# Altium PCB TPS40304_DEMO.PcbDoc
Units mil, origin at the board's own origin, x right, y up, seen from the top; angles counter-clockwise.
Board outline 6000 x 4000 mil, 2 copper layers (Top Layer, Bottom Layer); 38 components, 17 nets, 117 pads, 179 vias.
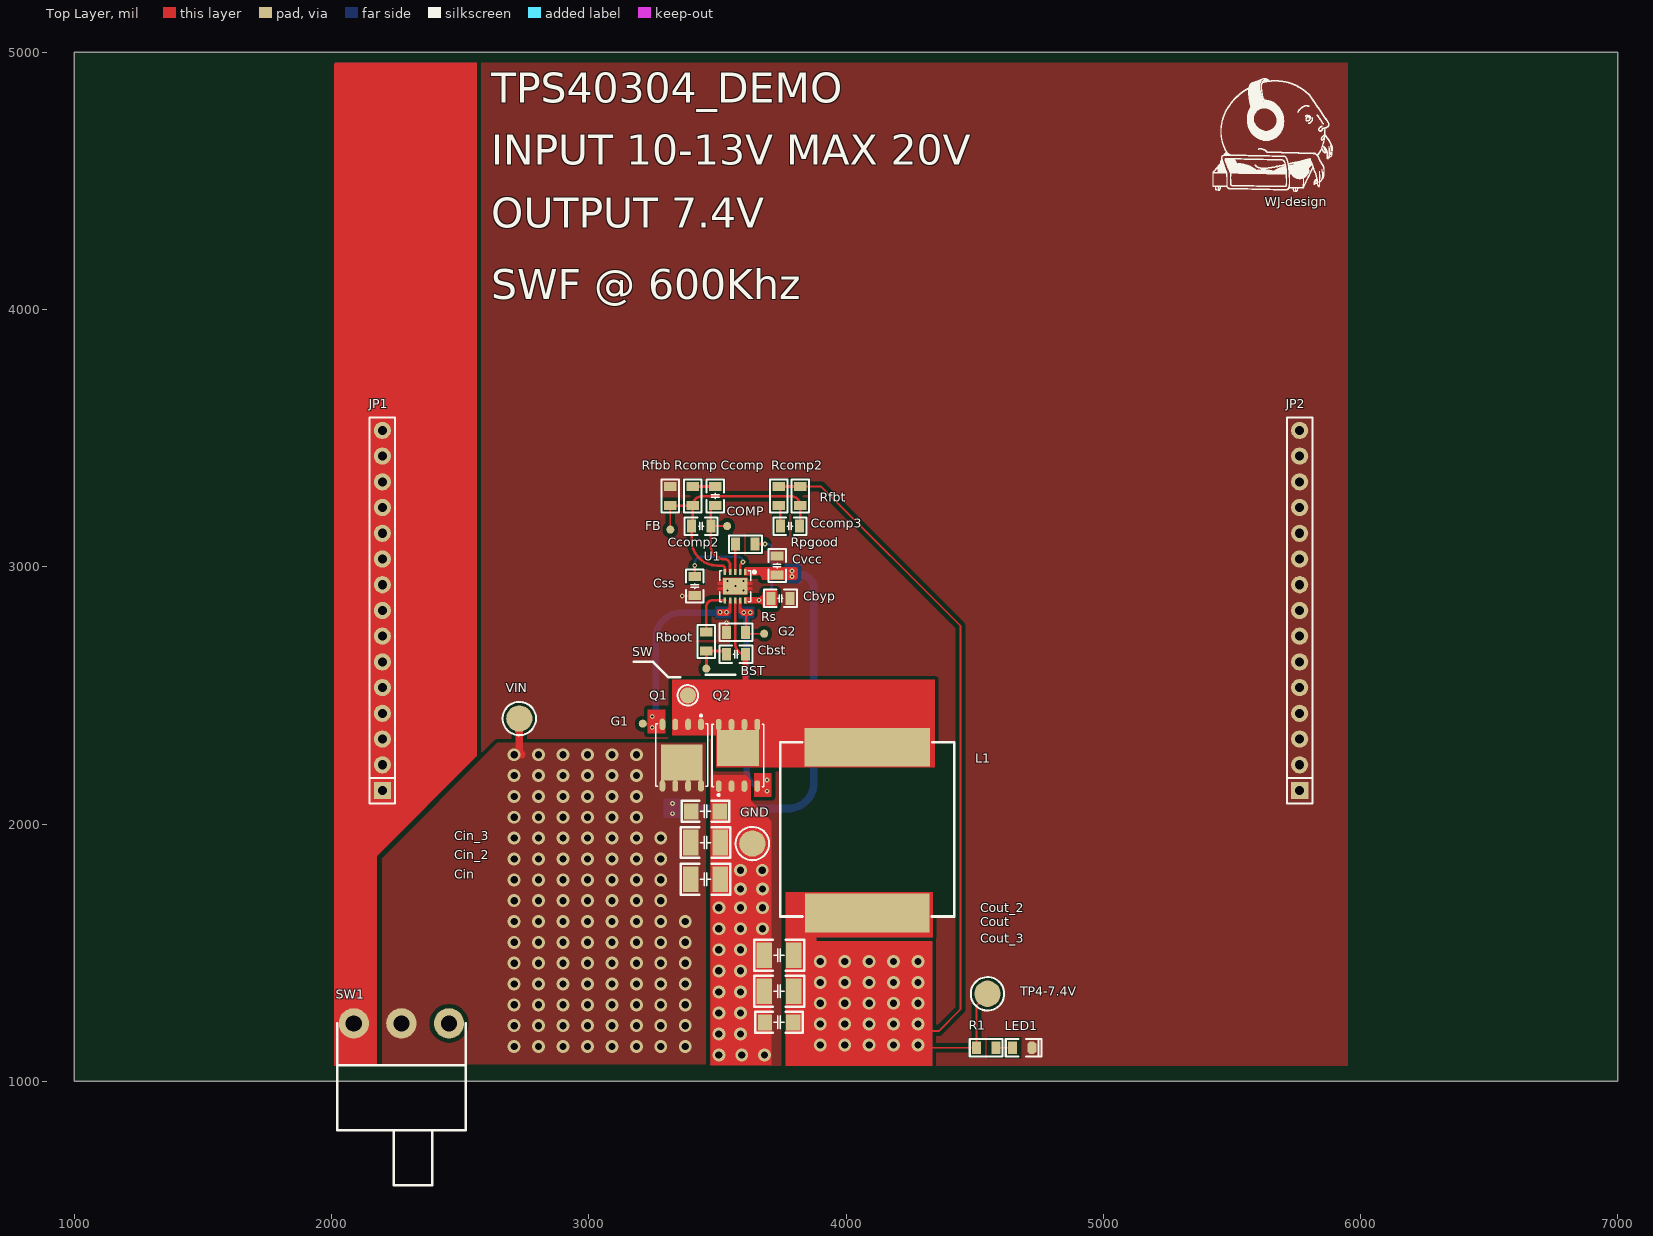
[diagram p0: Top Layer view]
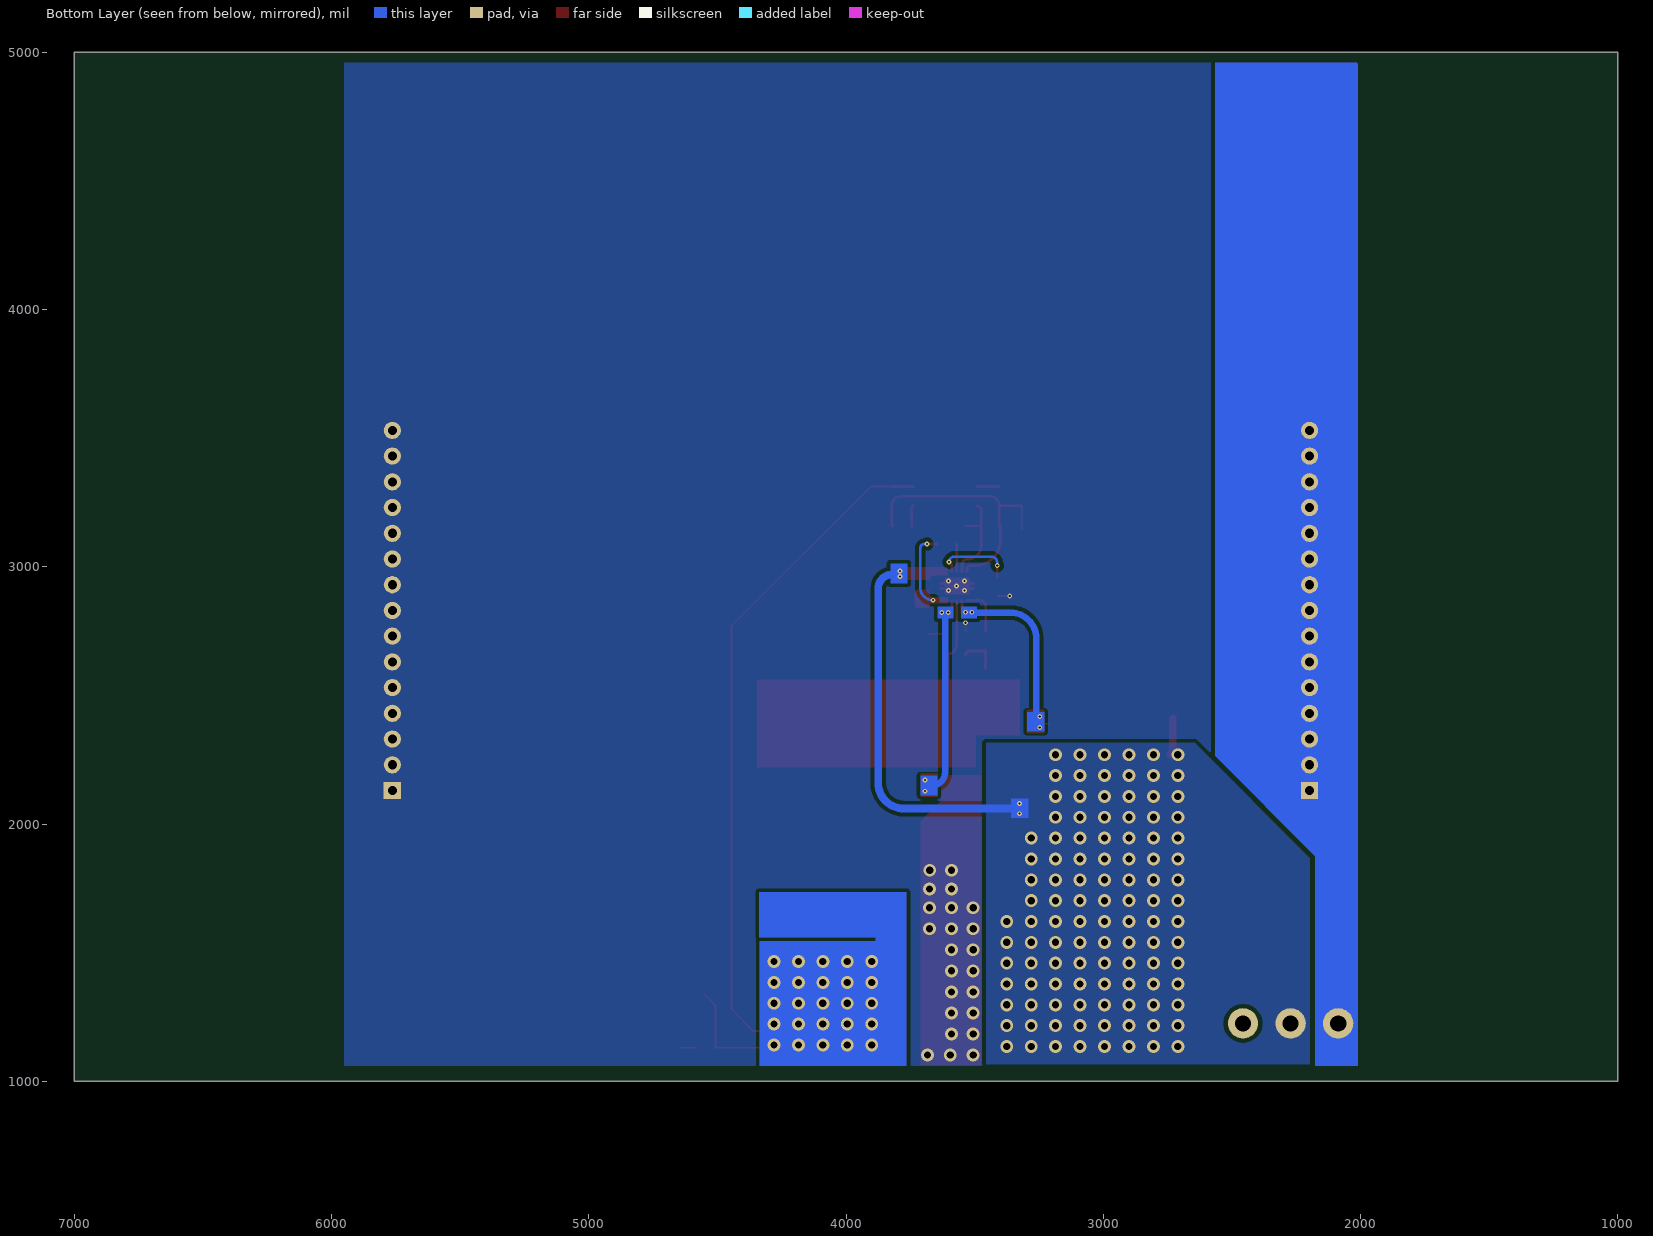
[diagram p1: Bottom Layer view, seen from below]

## Layer stack, top to bottom
Top Solder: solder mask 0.4, Solder Resist, Dk 3.5
Top Layer: signal copper 1.4
Dielectric 1: dielectric 12.6, FR-4, Dk 4.8
Bottom Layer: signal copper 1.4
Bottom Solder: solder mask 0.4, Solder Resist, Dk 3.5

## Board outline
1000,1000 7000,1000 7000,5000 1000,5000

## Design rules (kind name [scope] priority, off if disabled: settings)
Clearance inpg [InPolygon] p1: gap=16 ignorepadtopadclearanceinfootprint=FALSE
Clearance [All] p2: gap=7 ignorepadtopadclearanceinfootprint=FALSE
ComponentClearance [All] p1: gap=1 collisioncheckmode=3 verticalgap=1 showdistances=FALSE
PolygonConnect [All] p1: connectstyle=Direct reliefconductorwidth=10 reliefentries=4 polygonreliefangle="90 Angle" airgapwidth=10
RoutingVias [All] p1: holewidth=28 width=50 viastyle="Through Hole" minholewidth=28 minwidth=50 maxholewidth=28 maxwidth=50
SolderMaskExpansion [All] p1: expansion=4 istentingtop=FALSE
Width [All] p1: maxlimit=100 minlimit=7 preferedwidth=20
29 further rules are at their usual default settings.

## Classes and differential pairs
component class TPS40304_DEMO: BST Cbst Cbyp Ccomp Ccomp2 Ccomp3 Cin Cin_2 Cin_3 Cout Cout_2 Cout_3 Css Cvcc FB G1 G2 GND JP1 JP2 L1 LED1 Q1 Q2 R1 Rboot Rcomp Rcomp2 Rfbb Rfbt Rpgood Rs SW SW1 TP4-7.4V VIN

## Components (designator, comment, footprint, x,y, rotation, side; value= is the part's Value field where it differs from the comment)
BST "TEST" "TEST 0.8" 3456.96,2604.26 r0 top (schematic designator TP5)
Cbst "GRM155R71C104KA88D" "C 0805_L" 3571.96,2659.75 r0 top value=100nF
Cbyp "LMK212BJ475KD-T" "C 0805_L" 3744.95,2876.94 r0 top value=4.7uF
Ccomp "CGA4F2C0G1H153J085AA" "C 0805_L" 3491.96,3274.75 r270 top value=15nF
Ccomp2 "CL21C331JBANNNC" "C 0805_L" 3436.96,3158.14 r0 top value=330pF
Ccomp3 "C2012C0G1H182K060AA" "C 0805_L" 3782.47,3158.14 r0 top value=1.8nF
Cin "C3225X7R1H106M250AC" "C 1210_L" 3453.81,1785 r0 top value=10uF
Cin_2 "C3225X7R1H106M250AC" "C 1210_L" 3453.81,1927.99 r0 top value=10uF
Cin_3 "C3225X7R1H106M250AC" "C 1206_L" 3453.81,2049 r0 top value=10uF
COMP "TEST" "TEST 0.8" 3538.09,3158.14 r0 top (schematic designator TP6)
Cout "CL32B106KBJNNWE" "C 1210_L" 3740,1350 r180 top value=10uF
Cout_2 "CL32B106KBJNNWE" "C 1210_L" 3740,1490 r180 top value=10uF
Cout_3 "CL32B106KBJNNWE" "C 1206_L" 3740,1228.99 r180 top value=10uF
Css "GRM033R71A332KA01D" "C 0805_L" 3411.96,2924.75 r270 top value=3.3nF
Cvcc "TMK212B7105KG-T" "C 0805_L" 3731.9,3004.53 r90 top value=1uF
FB "TEST" "TEST 0.8" 3316.96,3144.75 r0 top (schematic designator TP9)
G1 "TEST" "TEST 0.8" 3210,2390 r0 top (schematic designator TP2)
G2 "TEST" "TEST 0.8" 3681.96,2739.75 r0 top (schematic designator TP7)
GND "TEST" "TEST 2.6" 3636.05,1923.99 r0 top (schematic designator TP8)
JP1 "HDR-1X15" HDR2.54-LI-15P 2197.63,2830.14 r90 top
JP2 "HDR-1X15" HDR2.54-LI-15P 5763.63,2830.14 r90 top
L1 "3.3UH" SMD-L-1770 4070,2010 r0 top
LED1 "红色" "LED 0805G" 4685,1130 r0 top
Q1 "IRFH7440TRPBF" PQFN-8P_L5.8-W4.9-P1.27-LS6.0-BL 3361.5,2239.03 r180 top
Q2 "IRFH7440TRPBF" PQFN-8P_L5.8-W4.9-P1.27-LS6.0-BL 3579.69,2295.31 r0 top
R1 "10K" "R 0805_L" 4545,1130 r0 top
Rboot "CRCW04022K87FKED" "R 0805_L" 3456.96,2709.75 r270 top value=10R
Rcomp "CRCW04021K24FKED" "R 0805_L" 3404.46,3274.75 r270 top value=1.24k
Rcomp2 "CRCW0402243RFKED" "R 0805_L" 3738.64,3274.75 r270 top value=243
Rfbb "CRCW0402887RFKED" "R 0805_L" 3316.96,3274.75 r90 top value=887
Rfbt "RC0201FR-0710KL" "R 0805_L" 3821.96,3274.75 r270 top value=10k
Rpgood "CRCW0402100KFKED" "R 0805_L" 3608.61,3088.24 r180 top value=100k
Rs "CRCW04022K87FKED" "R 0805_L" 3571.96,2744.75 r180 top value=2.87k
SW "TEST" "TEST 1.6" 3385,2500 r0 top (schematic designator TP3)
SW1 "SS12D06(弯角拨动开关) COPY" SS12_d06 2275,1035 r90 top
TP4-7.4V "TEST" "TEST 2.6" 4550,1340 r0 top (schematic designator TP4)
U1 "TPS40304DRCR" WSON-10_L3.0-W3.0-P0.50-TL-EP 3571.96,2924.75 r270 top value=N/A
VIN "TEST" "TEST 2.6" 2730,2410 r0 top (schematic designator TP1)

## Footprints (in the part's own frame and the unit in brackets; to place one, negate y for a bottom-side part, rotate by r counter-clockwise, add the part's x,y. Pads: shape width x height; smd on the part's side, far side on the other; paste and mask are expansions set on the pad)
"C 0805_L" [mil] "无极性贴片电容"
  rect 35x50 smd: 1(-37.4,0) 2(37.4,0)
  silkscreen extent -64,-34 64,34, body extent -39,-24 39,24, height 20
"C 1206_L" [mil] "无极性贴片电容"
  rect 55x62 smd: 1(-55.12,0) 2(55.11,0)
  silkscreen extent -92,-41 92,41, body extent -63,-32 63,32, height 48
"C 1210_L" [mil] "无极性贴片电容"
  rect 60x100 smd: 1(-57.09,0) 2(57.09,0)
  silkscreen extent -97,-60 97,60, body extent -63,-51 63,51, height 60
HDR2.54-LI-15P [mm] "排针，15脚"
  rect 1.7x1.7 hole 0.9: 1(-17.78,0)
  round 1.7 hole 0.9: 2(-15.24,0) 3(-12.7,0) 4(-10.16,0) 5(-7.62,0) 6(-5.08,0) 7(-2.54,0) 8(0,0) 9(2.54,0) 10(5.08,0) 11(7.62,0) 12(10.16,0) 13(12.7,0) 14(15.24,0) 15(17.78,0)
  silkscreen extent -19.05,-1.27 19.05,1.27, body extent -19.05,-1.27 19.05,1.27, height 8.5
"LED 0805G" [mil] "绿色0805LED"
  rect 35x50 smd: 1(-37.4,0)
  oct 35x50 smd: 2(37.4,0)
  silkscreen extent -64,-33 75,33, body extent -39,-25 39,25, height 32
PQFN-8P_L5.8-W4.9-P1.27-LS6.0-BL [mm]
  oval 0.567x1.141 smd: 1(-1.897,-3.761) 2(-0.627,-3.761) 3(0.643,-3.761) 4(1.913,-3.761) 5(1.913,2.315) 6(0.643,2.315) 7(-0.627,2.315) 8(-1.897,2.315)
  rect 4.11x3.55 smd: 9(0.008,-0.008)
  silkscreen extent -2.56,-4.73 2.57,2.37
"R 0805_L" [mil] "1/8W贴片电阻"
  rect 35x50 smd: 1(-37.4,0) 2(37.4,0)
  silkscreen extent -64,-34 64,34, body extent -39,-25 39,25, height 20
SMD-L-1770 [mm]
  rect 12.35x3.825 smd: 1(0.318,7.315)
  rect 12.32x3.825 smd: 2(0.317,-9.04)
  silkscreen extent -8.28,-9.38 8.92,7.82
SS12_d06 [mm]
  round 3 hole 1.6: 1(4.823,-4.614) 2(4.823,0.085) 3(4.823,4.784)
  silkscreen extent -11.18,-6.27 4.82,6.43
"TEST 0.8" [mm] "测试点0.8mm"
  round 0.8 smd: 1(0,0)
"TEST 1.6" [mm] "测试点1.6mm"
  round 1.6 smd paste-1.6: 1(0,0)
  silkscreen extent -1.01,-1.02 1.02,1.02
"TEST 2.6" [mm] "测试点2.6mm"
  round 2.6 smd paste-2.6: 1(0,0)
  silkscreen extent -1.65,-1.65 1.65,1.65
WSON-10_L3.0-W3.0-P0.50-TL-EP [mm]
  rect 0.6x0.25 smd: 1(-1.4,0.923) 2(-1.4,0.422) 3(-1.4,-0.078) 4(-1.4,-0.578) 5(-1.4,-1.079) 6(1.4,-1.079) 7(1.4,-0.578) 8(1.4,-0.078) 9(1.4,0.422) 10(1.4,0.923)
  rect 1.65x2.4 smd: 11(0.005,-0.077)
  Top Layer region: -0.125,1.622 -0.125,1.122 0.125,1.122 0.125,1.622 0.375,1.622 0.375,1.122 0.825,1.122 0.825,-1.278 0.375,-1.278 0.375,-1.778 0.125,-1.778 0.125,-1.278 -0.125,-1.278 -0.125,-1.778 -0.125,-1.778 -0.375,-1.778 -0.375,-1.278 -0.825,-1.278 -0.825,1.122 -0.375,1.122 -0.375,1.622
  silkscreen extent -1.52,-1.6 1.52,1.95

## Part data
BST COMP FB G1 G2 GND SW TP4-7.4V VIN: "测试点", BOM名称=测试点, 学习资源=www.ooocke.com, 版权归属=源创客
Cbst: "GRM155R71C104KA8", Manufacturer Name=MuRata, Manufacturer Part Number=GRM155R71C104KA88D, PackageReference=GRM155R71C104KA88D
Cbyp Cvcc: Manufacturer Name="Taiyo Yuden"
  Cbyp: Manufacturer Part Number=LMK212BJ475KD-T, PackageReference=LMK212BJ475KD-T
  Cvcc: Manufacturer Part Number=TMK212B7105KG-T, PackageReference=TMK212B7105KG-T
Ccomp: "CGA4F2C0G1H153J0", Manufacturer Name=TDK, Manufacturer Part Number=CGA4F2C0G1H153J085AA, PackageReference=CGA4F2C0G1H153J085AA
Ccomp2 Cout Cout_2 Cout_3: Manufacturer Name="Samsung Electro-Mechanics"
  Ccomp2: Manufacturer Part Number=CL21C331JBANNNC, PackageReference=CL21C331JBANNNC
  Cout Cout_2 Cout_3: Manufacturer Part Number=CL32B106KBJNNWE, PackageReference=CL32B106KBJNNWE
Ccomp3: "C2012C0G1H182K06", Manufacturer Name=TDK, Manufacturer Part Number=C2012C0G1H182K060AA, PackageReference=C2012C0G1H182K060AA
Cin Cin_2 Cin_3: "C3225X7R1H106M25", Manufacturer Name=TDK, Manufacturer Part Number=C3225X7R1H106M250AC, PackageReference=C3225X7R1H106M250AC
Css: "GRM033R71A332KA0", Manufacturer Name=MuRata, Manufacturer Part Number=GRM033R71A332KA01D, PackageReference=GRM033R71A332KA01D
JP1 JP2: library part "Header 15", "15P接插件", BOM名称=15P接插件, 学习资源=www.ooocke.com, 版权归属=源创客
L1: library part L-CD, "贴片功率电感", BOM名称=功率电感, 学习资源=www.ooocke.com, 版权归属=源创客
LED1: library part LED-SMD, "贴片LED", BOM名称=贴片LED, 学习资源=www.ooocke.com, 版权归属=源创客
R1: library part R, "贴片电阻", BOM名称=贴片电阻, 学习资源=www.ooocke.com, 版权归属=源创客
Rboot Rcomp Rcomp2 Rfbb Rpgood Rs: Manufacturer Name=Vishay-Dale
  Rboot Rs: Manufacturer Part Number=CRCW04022K87FKED, PackageReference=CRCW04022K87FKED
  Rcomp: Manufacturer Part Number=CRCW04021K24FKED, PackageReference=CRCW04021K24FKED
  Rcomp2: Manufacturer Part Number=CRCW0402243RFKED, PackageReference=CRCW0402243RFKED
  Rfbb: Manufacturer Part Number=CRCW0402887RFKED, PackageReference=CRCW0402887RFKED
  Rpgood: Manufacturer Part Number=CRCW0402100KFKED, PackageReference=CRCW0402100KFKED
Rfbt: Manufacturer Name=Yageo, Manufacturer Part Number=RC0201FR-0710KL, PackageReference=RC0201FR-0710KL
U1: Manufacturer Name="Texas Instruments", Manufacturer Part Number=TPS40304DRCR, PackageReference=TPS40304DRCR

## Via types
v1: diameter 50, hole 28, Top Layer to Bottom Layer, 156 vias
v2: diameter 19, hole 8, Top Layer to Bottom Layer, 23 vias

## Nets (pads, with @x,y where several pads share a name; then routed paths per layer and width w, separated by ;. In a path a pad name is that pad's centre, name@x,y a point inside that pad or via, vN(x,y) a via of type N, cw(c..) or ccw(c..) an arc to the next point about the centre after c; other vN are vias at no path point)
0: Cbyp.2 Cin.2 Cin_2.2 Cin_3.2 Cout.2 Cout_2.2 Cout_3.2 Css.2 Cvcc.2 GND.1 JP2.1 JP2.2 JP2.3 JP2.4 JP2.5 JP2.6 JP2.7 JP2.8 JP2.9 JP2.10 JP2.11 JP2.12 JP2.13 JP2.14 JP2.15 LED1.2 Q2.1 Q2.2 Q2.3 Rfbb.2 Rs.2 U1.11 | length 86.6
  Top Layer w7: v2(3363.36,2886.68) 3411.28,2886.68 Css.2 ; Rs.2 3534.73,2744.93 v2(3534.73,2782.43)
  other v1: 3505.62,1102.14 3594.56,1102.14 3683.51,1102.14 3505.62,1183.91 3590.31,1183.91 3505.62,1265.67 3590.31,1265.67 3505.62,1347.44 3590.31,1347.44 3505.62,1429.21 3590.31,1429.21 3505.62,1510.98 3590.31,1510.98 3505.62,1592.75 3590.31,1592.75 3675,1592.75 3505.62,1674.51 3590.31,1674.51 3675,1674.51 3590.31,1747.26 3675.13,1747.26 3590.31,1820 3674.22,1820
  other v2: 3539.63,2907.57 3601.89,2907.57 3570.68,2925.96 3539.63,2944.33 3601.89,2944.33
NetCbst_1: BST.1 Cbst.1 Rboot.2 | length 152.9
  Top Layer w12: BST.1 Rboot.2 3521.95,2672.36 cw(c3521.95,2659.75) Cbst.1
NetCbst_2: Cbst.2 L1.1 Q1.1 Q1.2 Q1.3 Q2.5 Q2.6 Q2.7 Q2.8 Q2.9 SW.1 U1.8 | length 360.2
  Top Layer w10: U1.8 3568.89,2700.22 ccw(c3609.36,2700.22) Cbst.2
  Top Layer w25: 3605,2535 ccw(c3605,2539.36) 3609.36,2539.36 Cbst.2
NetCbyp_1: Cbyp.1 Rpgood.1 U1.10 | length 297.7
  Top Layer w10: Rpgood.1 3646.27,3088.5 v2(3684.83,3088.5)
  Bottom Layer w10: v2(3661.59,2870.03) ccw(c3661.59,2920.4) 3711.96,2920.4 3711.96,3070.11 ccw(c3692.87,3070.11) v2@3692.87,3089.19
NetCcomp2_1: Ccomp2.1 Ccomp3.2 FB.1 Rcomp.2 Rfbb.1 Rfbt.2 U1.5 | length 1062.6
  Top Layer w7: FB.1 Rfbb.1
  Top Layer w10: Rfbb.1@3316.96,3237.36 Rcomp.2 ; U1.5 3529.49,2992.22 ccw(c3516.96,2992.22) 3516.96,3004.75 3499.55,3004.75 cw(c3499.55,3104.75) 3399.55,3104.75 Ccomp2.1 ccw(c3399.55,3163.04) 3404.46,3163.04 Rcomp.2 ; Ccomp3.2 ccw(c3819.87,3160.22) 3821.96,3160.22 Rfbt.2 ccw(c3784.56,3237.36) 3784.56,3274.75 3441.85,3274.75 ccw(c3441.85,3237.36) Rcomp.2
NetCcomp2_2: Ccomp2.2 Ccomp.2 COMP.1 U1.4 | length 374
  Top Layer w7: Ccomp2.2 COMP.1
  Top Layer w10: Ccomp.2 ccw(c3491.96,3219.76) 3474.36,3219.76 Ccomp2.2 3474.36,3082.36 ccw(c3526.96,3082.36) 3526.96,3029.75 cw(c3526.96,3007.52) 3549.19,3007.52 U1.4
NetCcomp3_1: Ccomp3.1 Rcomp2.2 | length 82.9
  Top Layer w10: Rcomp2.2 cw(c3738.64,3230.93) 3745.06,3230.93 Ccomp3.1
NetCcomp_1: Ccomp.1 Rcomp.1 | length 87.5
  Top Layer w10: Rcomp.1 Ccomp.1
NetCout_1: Cout.1 Cout_2.1 Cout_3.1 L1.2 R1.1 Rcomp2.1 Rfbt.1 TP4-7.4V.1 | length 3273
  Top Layer w7: Rfbt.1@3822.25,3311.87 3903.13,3311.87 4445,2770 4445,1280 4360,1195 4085,1195 ; v1@4280,1135 4285,1130 R1.1 4507.6,1295.17 4550,1337.58 TP4-7.4V.1
  Top Layer w10: Rcomp2.1 Rfbt.1
  other v1: 3900,1141 3995,1141 4090,1141 4185,1141 4280,1141 3900,1222 3995,1222 4090,1222 4185,1222 4280,1222 3900,1303 3995,1303 4090,1303 4185,1303 4280,1303 3900,1384 3995,1384 4090,1384 4185,1384 4280,1384 3900,1465 3995,1465 4090,1465 4185,1465 4280,1465
NetCss_1: Css.1 U1.2 | length 308.8
  Top Layer w10: Css.1 v2(3411.96,3004.75) ; U1.2 3588.59,3006.68 3598.97,3017.07 v2(3598.97,3018.29)
  Bottom Layer w10: v2(3411.96,3004.75) 3411.96,3014.75 cw(c3436.96,3014.75) 3436.96,3039.75 3577.51,3039.75 cw(c3577.51,3018.29) v2(3598.97,3018.29)
NetJP1_1: JP1.1 JP1.2 JP1.3 JP1.4 JP1.5 JP1.6 JP1.7 JP1.8 JP1.9 JP1.10 JP1.11 JP1.12 JP1.13 JP1.14 JP1.15 SW1.3
NetLED1_1: LED1.1 R1.2 | length 65.2
  Top Layer w7: R1.2 LED1.1
NetQ1_4: G1.1 Q1.4 U1.7 | length 669.9
  Top Layer w7: G1.1 3283.27,2390 Q1.4
  Bottom Layer w25: 3260,2425 3260,2721.3 cw(c3360,2721.3) 3360,2821.3 3499.14,2821.3
  other v2: 3246.73,2374.53 3246.73,2418.39 3510.95,2823.08 3536.17,2823.08
NetQ2_4: G2.1 Q2.4 Rs.1 U1.9 | length 834.1
  Top Layer w7: Rs.1@3611.96,2747.35 3619.56,2739.75 G2.1
  Top Layer w10: Rs.1@3611.96,2747.35 3611.96,2819.75
  Bottom Layer w25: 3615,2810 3615,2200 ccw(c3665,2200) 3665,2150
  other v2: 3693.12,2127.48 3693.12,2171.34 3602.61,2822.92 3627.84,2822.92
NetRboot_1: Rboot.1 U1.6 | length 184.3
  Top Layer w10: Rboot.1 3456.96,2844.75 cw(c3481.84,2844.75) 3481.84,2869.63 U1.6
NetRpgood_2: Rpgood.2 U1.3 | length 109.7
  Top Layer w10: U1.3 3568.89,3085.93 cw(c3571.21,3085.93) Rpgood.2
VCC: Cin.1 Cin_2.1 Cin_3.1 Cvcc.1 Q1.5 Q1.6 Q1.7 Q1.8 Q1.9 SW1.2 U1.1 VIN.1 | length 1587.6
  Top Layer w30: VIN.1 2730,2280 2740,2270
  Bottom Layer w30: 3345,2060 3775,2060 ccw(c3775,2160) 3875,2160 3875,2915 ccw(c3820,2915) 3820,2970 3805,2970
  other v1: 2710,1135 2805,1135 2900,1135 2995,1135 3090,1135 3185,1135 3280,1135 3375,1135 2710,1216 2805,1216 2900,1216 2995,1216 3090,1216 3185,1216 3280,1216 3375,1216 2710,1297 2805,1297 2900,1297 2995,1297 3090,1297 3185,1297 3280,1297 3375,1297 2710,1378 2805,1378 2900,1378 2995,1378 3090,1378 3185,1378 3280,1378 3375,1378 2710,1459 2805,1459 2900,1459 2995,1459 3090,1459 3185,1459 3280,1459 3375,1459 2710,1540 2805,1540 2900,1540 2995,1540 3090,1540 3185,1540 3280,1540 3375,1540 2710,1621 2805,1621 2900,1621 2995,1621 3090,1621 3185,1621 3280,1621 3375,1621 2710,1702 2805,1702 2900,1702 2995,1702 3090,1702 3185,1702 3280,1702 2710,1783 2805,1783 2900,1783 2995,1783 3090,1783 3185,1783 3280,1783 2710,1864 2805,1864 2900,1864 2995,1864 3090,1864 3185,1864 3280,1864 2710,1945 2805,1945 2900,1945 2995,1945 3090,1945 3185,1945 3280,1945 2710,2026 2805,2026 2900,2026 2995,2026 3090,2026 3185,2026 2710,2107 2805,2107 2900,2107 2995,2107 3090,2107 3185,2107 2710,2188 2805,2188 2900,2188 2995,2188 3090,2188 3185,2188 2710,2269 2805,2269 2900,2269 2995,2269 3090,2269 3185,2269
  other v2: 3325,2040 3325,2080 3790.43,2962.43 3790.23,2984.06
pads on no net: SW1.1

## Polygon pours and split planes (outlines as drawn)
0 on Top Layer "0_L01_P002" (solid, remove dead copper, pour order 2): 2015,4960 5950,4960 5950,1060 2010,1060
VCC on Top Layer "VCC_L01_P000" (solid, remove dead copper, pour order 0): 2196.85,1066.53 2196.85,1866.85 2645,2315 3455,2315 3455,1065
0 on Bottom Layer "0_L02_P003" (solid, remove dead copper, pour order 3): 2015,4960 5950,4960 5950,1060 2010,1060
VCC on Bottom Layer "VCC_L02_P001" (solid, remove dead copper, pour order 1): 2196.85,1066.53 2196.85,1866.85 2645,2315 3455,2315 3455,1065

## Other copper
Top Layer:
  region net VCC: 3603.66,2974.51 3603.66,2989.85 cw(c3611.6,2989.85) 3611.6,2997.78 3803.93,2997.78 cw(c3803.93,2989.75) 3811.96,2989.75 3811.96,2959.75 cw(c3801.96,2959.75) 3801.96,2949.75 3676.96,2949.75 cw(c3676.96,2954.75) 3671.96,2954.75 ccw(c3658.91,2954.75) 3658.91,2967.81 3603.49,2967.81
  region net NetCbyp_1: 3603.64,2857.68 3664.03,2857.68 cw(c3664.03,2844.75) 3676.96,2844.75 ccw(c3681.96,2844.75) 3681.96,2839.75 3721.96,2839.75 ccw(c3721.96,2849.75) 3731.96,2849.75 3731.96,2904.75 ccw(c3726.96,2904.75) 3726.96,2909.75 3686.96,2909.75 ccw(c3686.96,2899.75) 3676.96,2899.75 cw(c3658.61,2899.75) 3658.61,2881.41 3603.5,2881.41
  pour cut-out: 3745,2315 3745,1640 4420,1640 4420,2315
  region net NetJP1_1: 2565,4960 2565,2265 2175,1875 2175,1060 2010,1060 2010,4955 2015,4960
  region net NetCout_1: 3765,1734.02 4336.72,1734.02 4336.72,1560 3885,1560 3885,1545 4335,1545 4335,1060 3765,1060
  region net NetQ2_4: 3642.43,2106.43 3642.43,2197.95 3709.85,2197.95 3709.85,2106.43
  region net NetQ1_4: 3297.42,2353.48 3297.42,2445 3230,2445 3230,2353.48
  region net NetQ2_4: 3583.73,2873.46 3583.73,2821.84 3595.82,2809.75 3635.82,2809.75 3640.82,2814.75 3640.82,2829.75 3635.82,2834.75 3601.34,2834.75 3593.42,2842.67 3593.42,2868.48
  region net NetQ1_4: 3554.04,2873.46 3554.04,2821.84 3541.96,2809.75 3501.96,2809.75 3496.96,2814.75 3496.96,2829.75 3501.96,2834.75 3536.44,2834.75 3544.36,2842.67 3544.36,2868.48
  region net NetCbst_2: 3325,2560 4345,2560 4345,2220 3495,2220 3495,2345 3325,2345
  region net 0: 3475,2190 3610,2190 3630,2170 3630,2090 3710,2010 3710,1060 3705,1065 3475,1065
Bottom Layer:
  region net NetJP1_1: 2565,4960 2565,2265 2175,1875 2175,1060 2010,1060 2010,4955 2015,4960
  region net NetCout_1: 3765,1734.02 4336.72,1734.02 4336.72,1560 3885,1560 3885,1545 4335,1545 4335,1060 3765,1060
  region net VCC: 3761.95,2936.56 3826.95,2936.56 3826.95,3011.56 3761.95,3011.56
  region net VCC: 3292.03,2023.6 3357.03,2023.6 3357.03,2098.6 3292.03,2098.6
  region net NetQ2_4: 3643.33,2844.83 3583.33,2844.83 3583.33,2799.83 3643.33,2799.83
  region net NetQ2_4: 3644.99,2112.41 3709.99,2112.41 3709.99,2187.41 3644.99,2187.41
  region net NetQ1_4: 3230,2360 3295,2360 3295,2435 3230,2435
  region net NetQ1_4: 3551.96,2844.75 3491.96,2844.75 3491.96,2799.75 3551.96,2799.75

## Silkscreen, mask and mechanical layers (free items; w line width, h text height)
Top Overlay:
  drawing of 2565 lines, arcs and shapes, not listed
  text "TPS40304_DEMO" at 2620,4765.54 h200
  text "INPUT 10-13V MAX 20V" at 2620,4523.42 h200
  text "WJ-design" at 5627,4389.87 h60
  text "OUTPUT 7.4V" at 2620,4279.77 h200
  text "SWF @ 600Khz" at 2620,4000.33 h200
Top Solder:
  region: 4055,1535 4055,1060 3870,1060 3870,1535
  region: 3615,1550 3615,1055 3470,1055 3470,1550
Mechanical 1:
  lines w10: 2013.13,1061.89 5948.13,1061.89 5948.13,4961.89 2013.13,4961.89 2013.13,1061.89